# Altium PCB LTO 16S BMS.PcbDoc
Units mm, origin at the board's own origin, x right, y up, seen from the top; angles counter-clockwise.
Board outline 100 x 110 mm, 4 copper layers (L1 - Primary, L2 - GND, L3 - GND, L4 - Secondary), stack 1.685 mm thick; 56 components, 170 nets, 215 pads, 77 vias.
Unrouted connection lines stored in the file: 9.
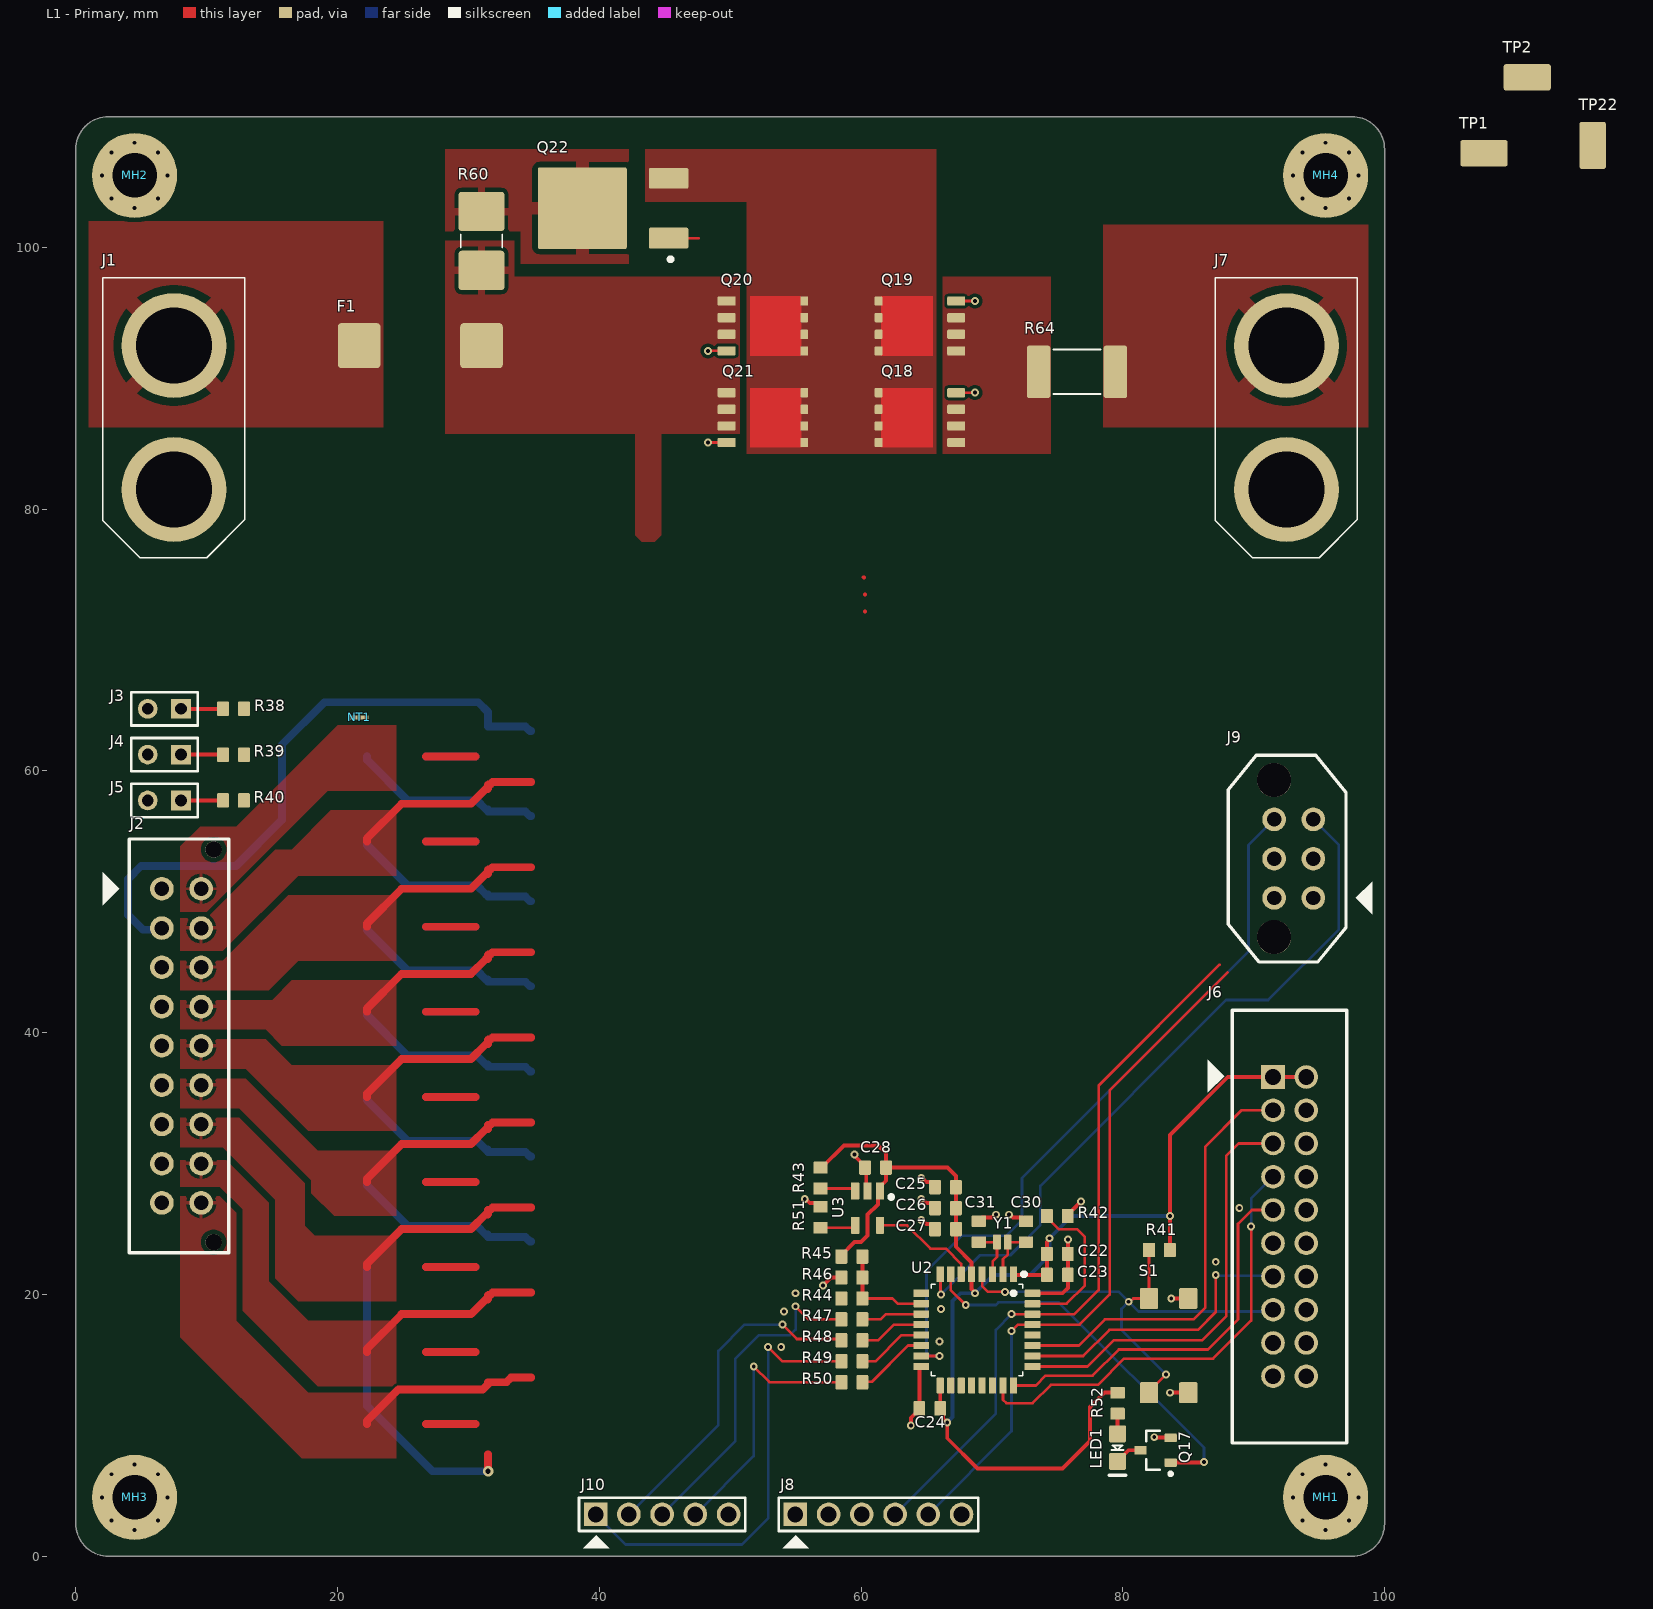
[diagram p0: L1 - Primary view]
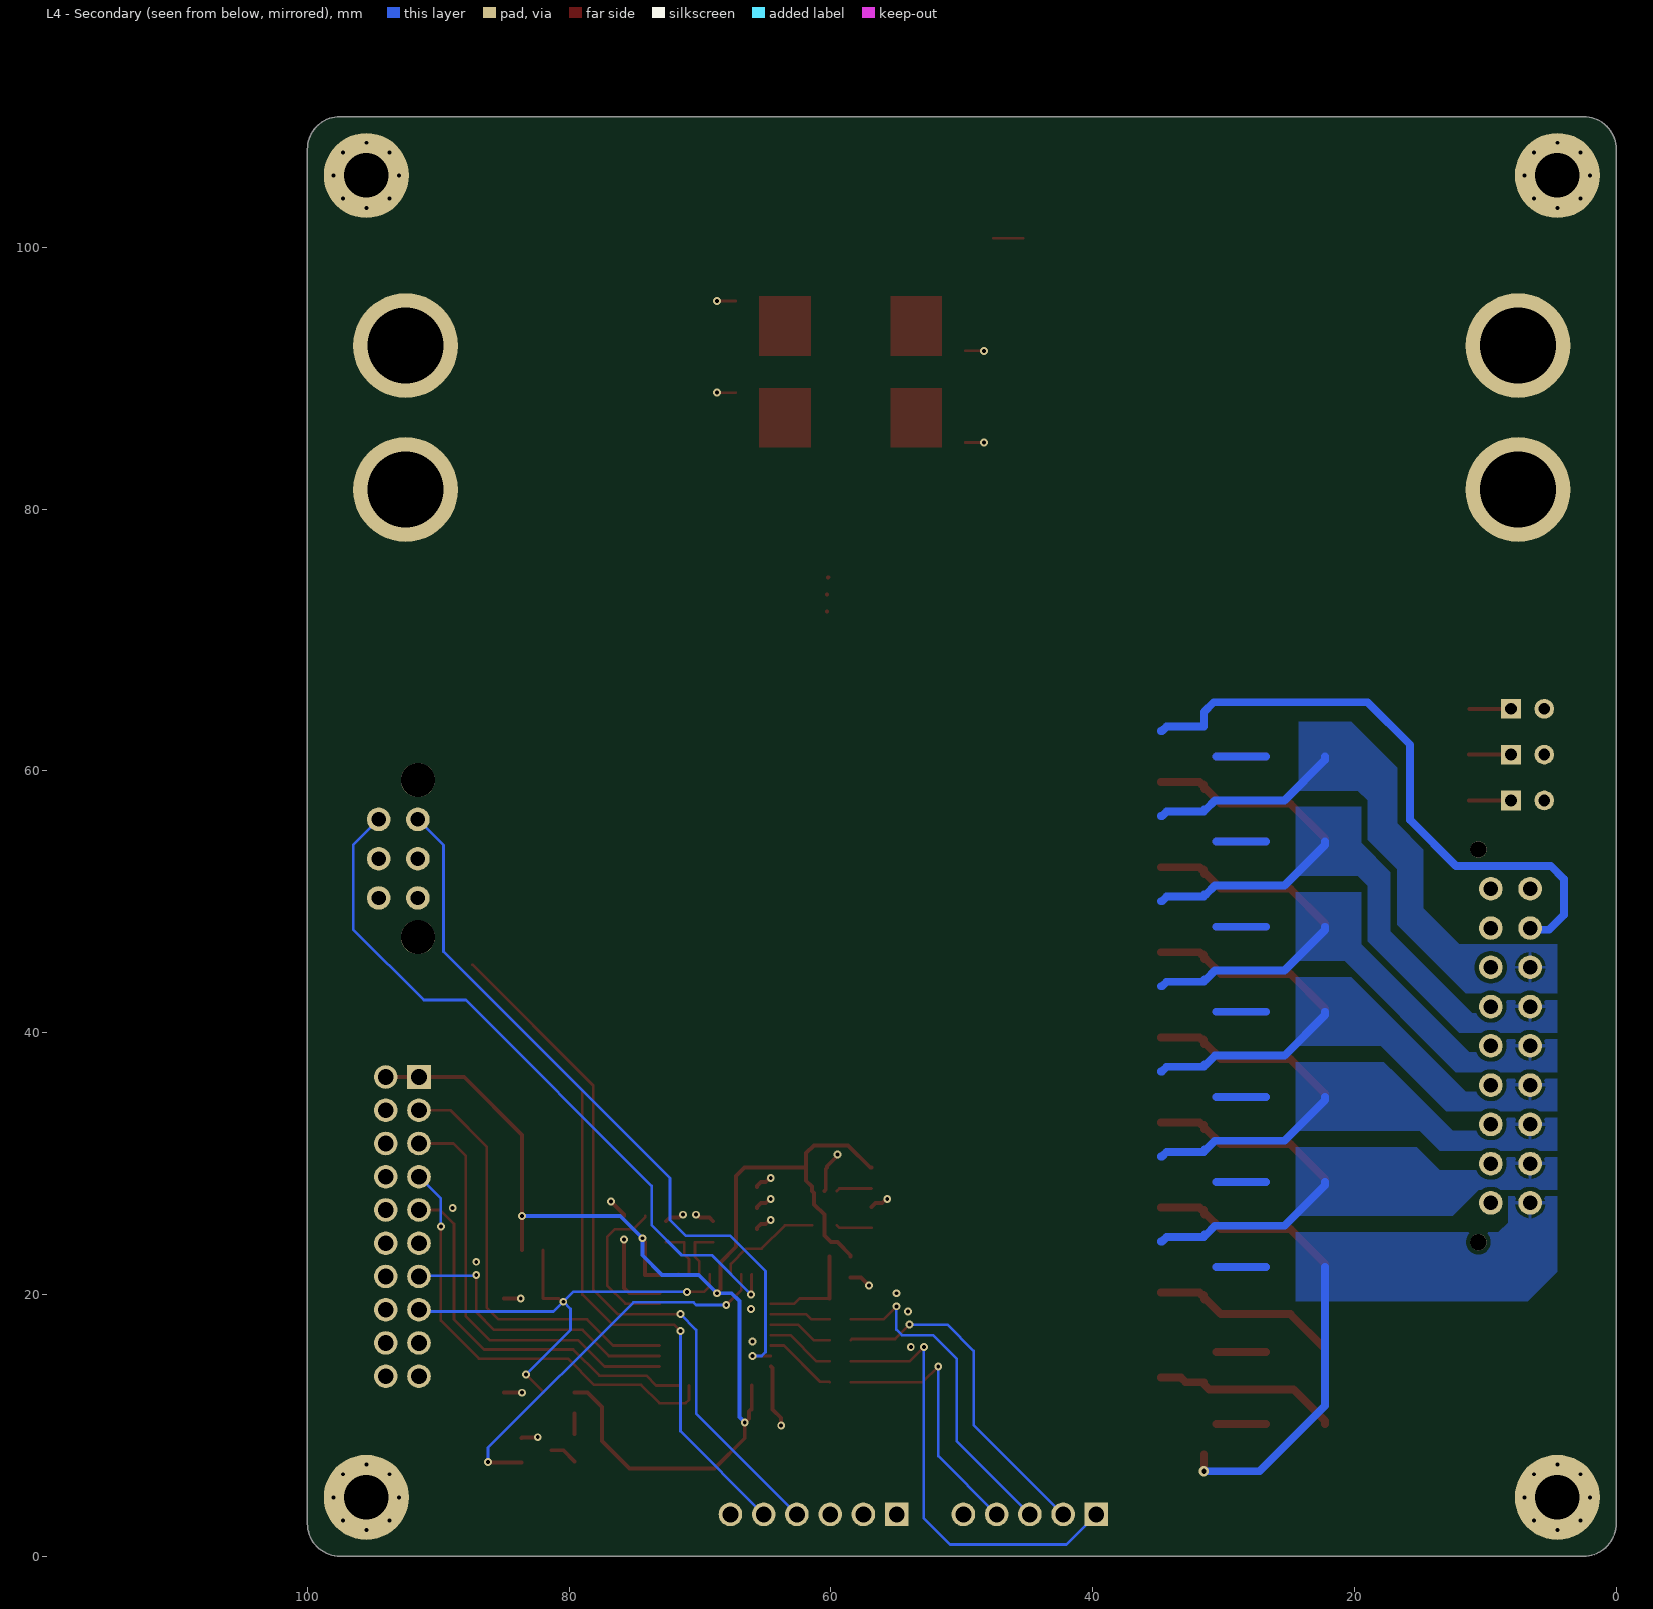
[diagram p1: L4 - Secondary view, seen from below]
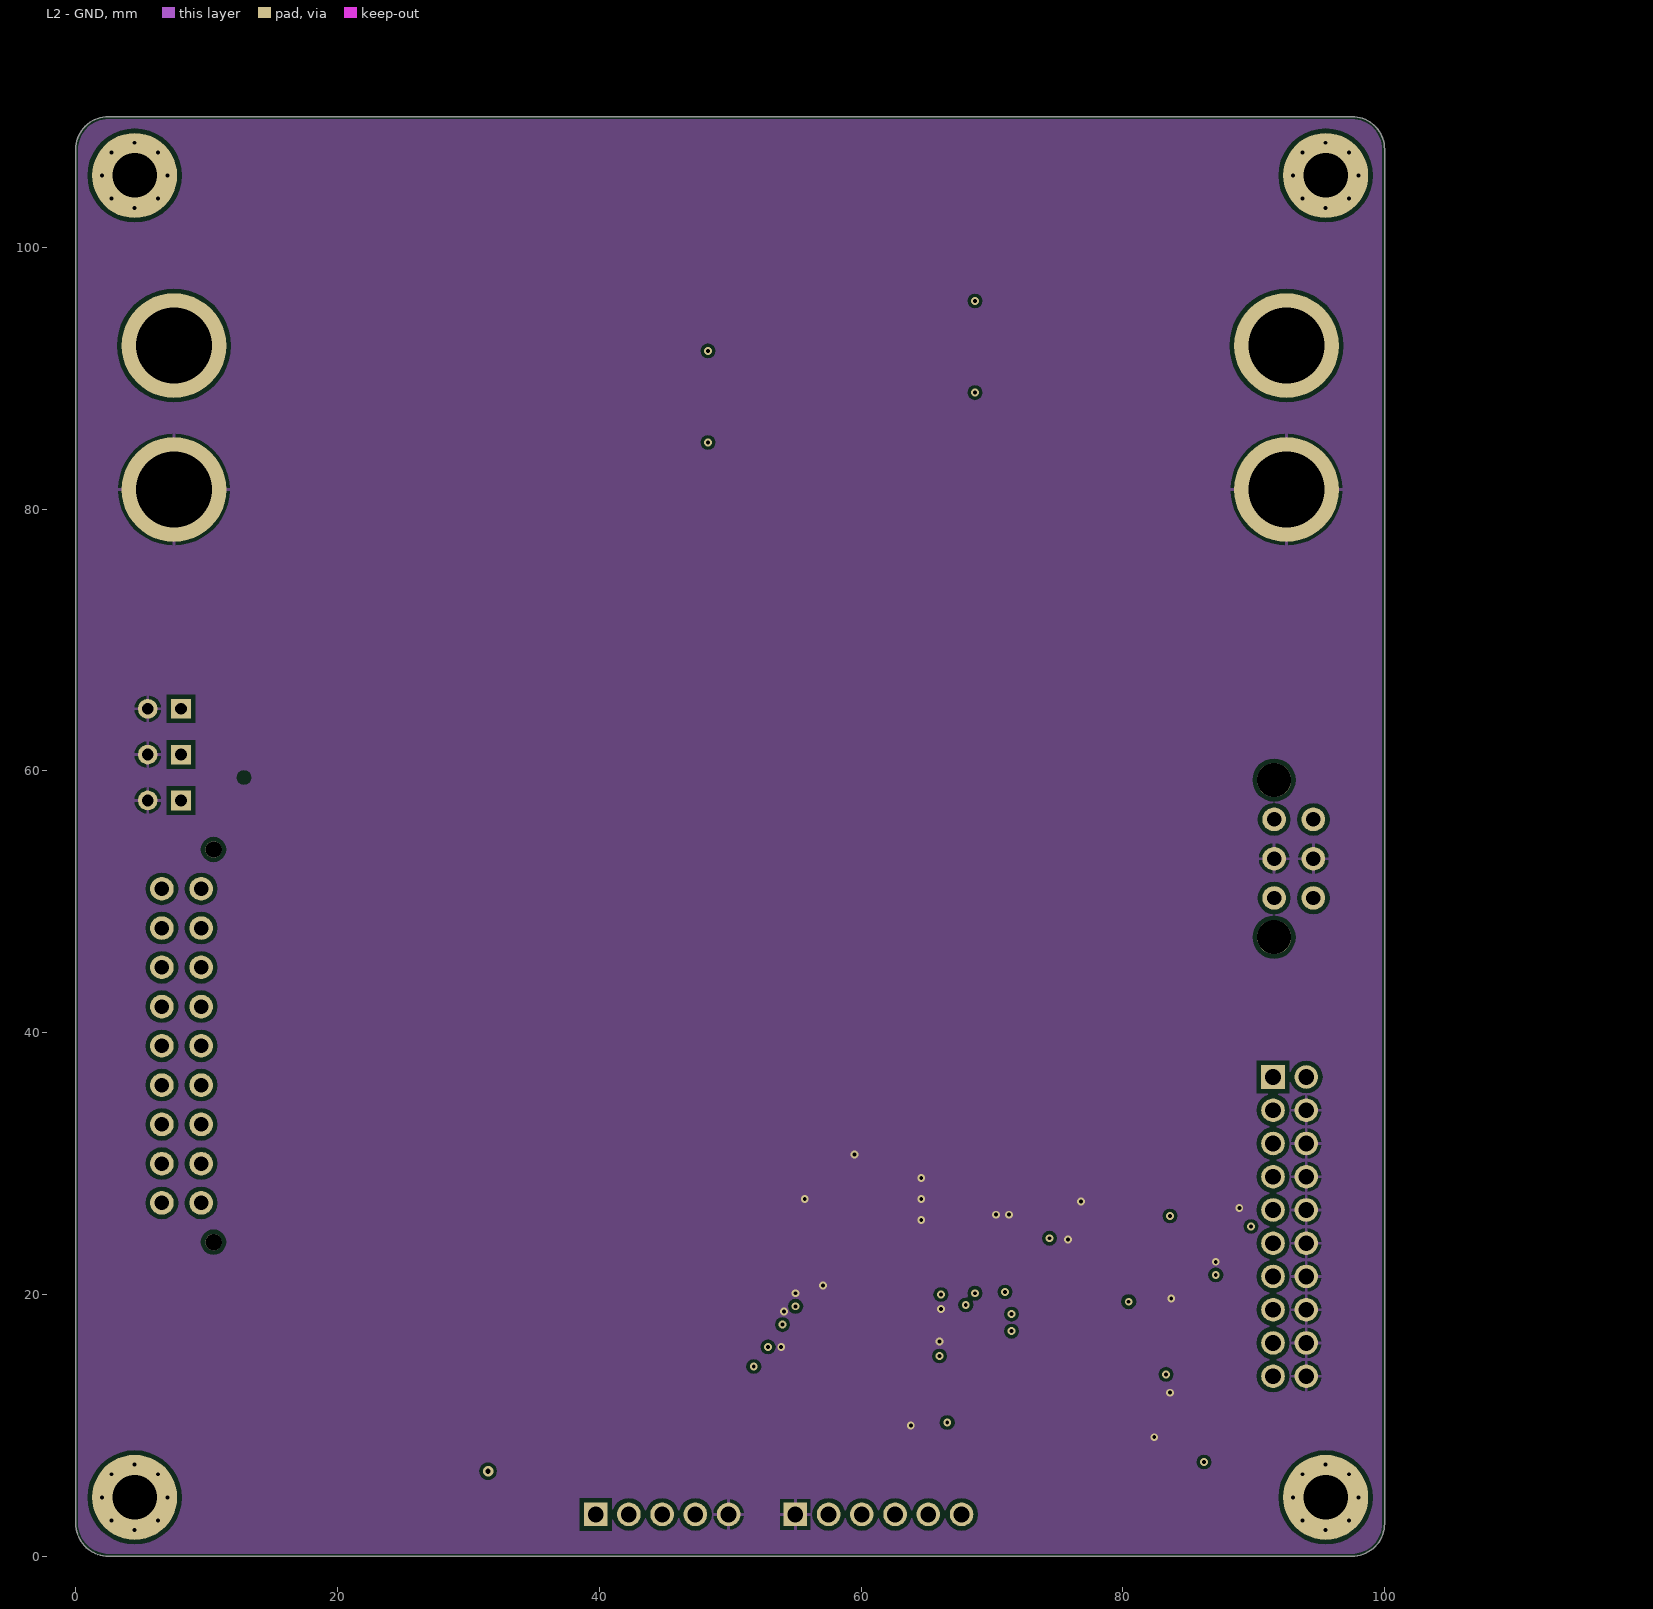
[diagram p2: L2 - GND]
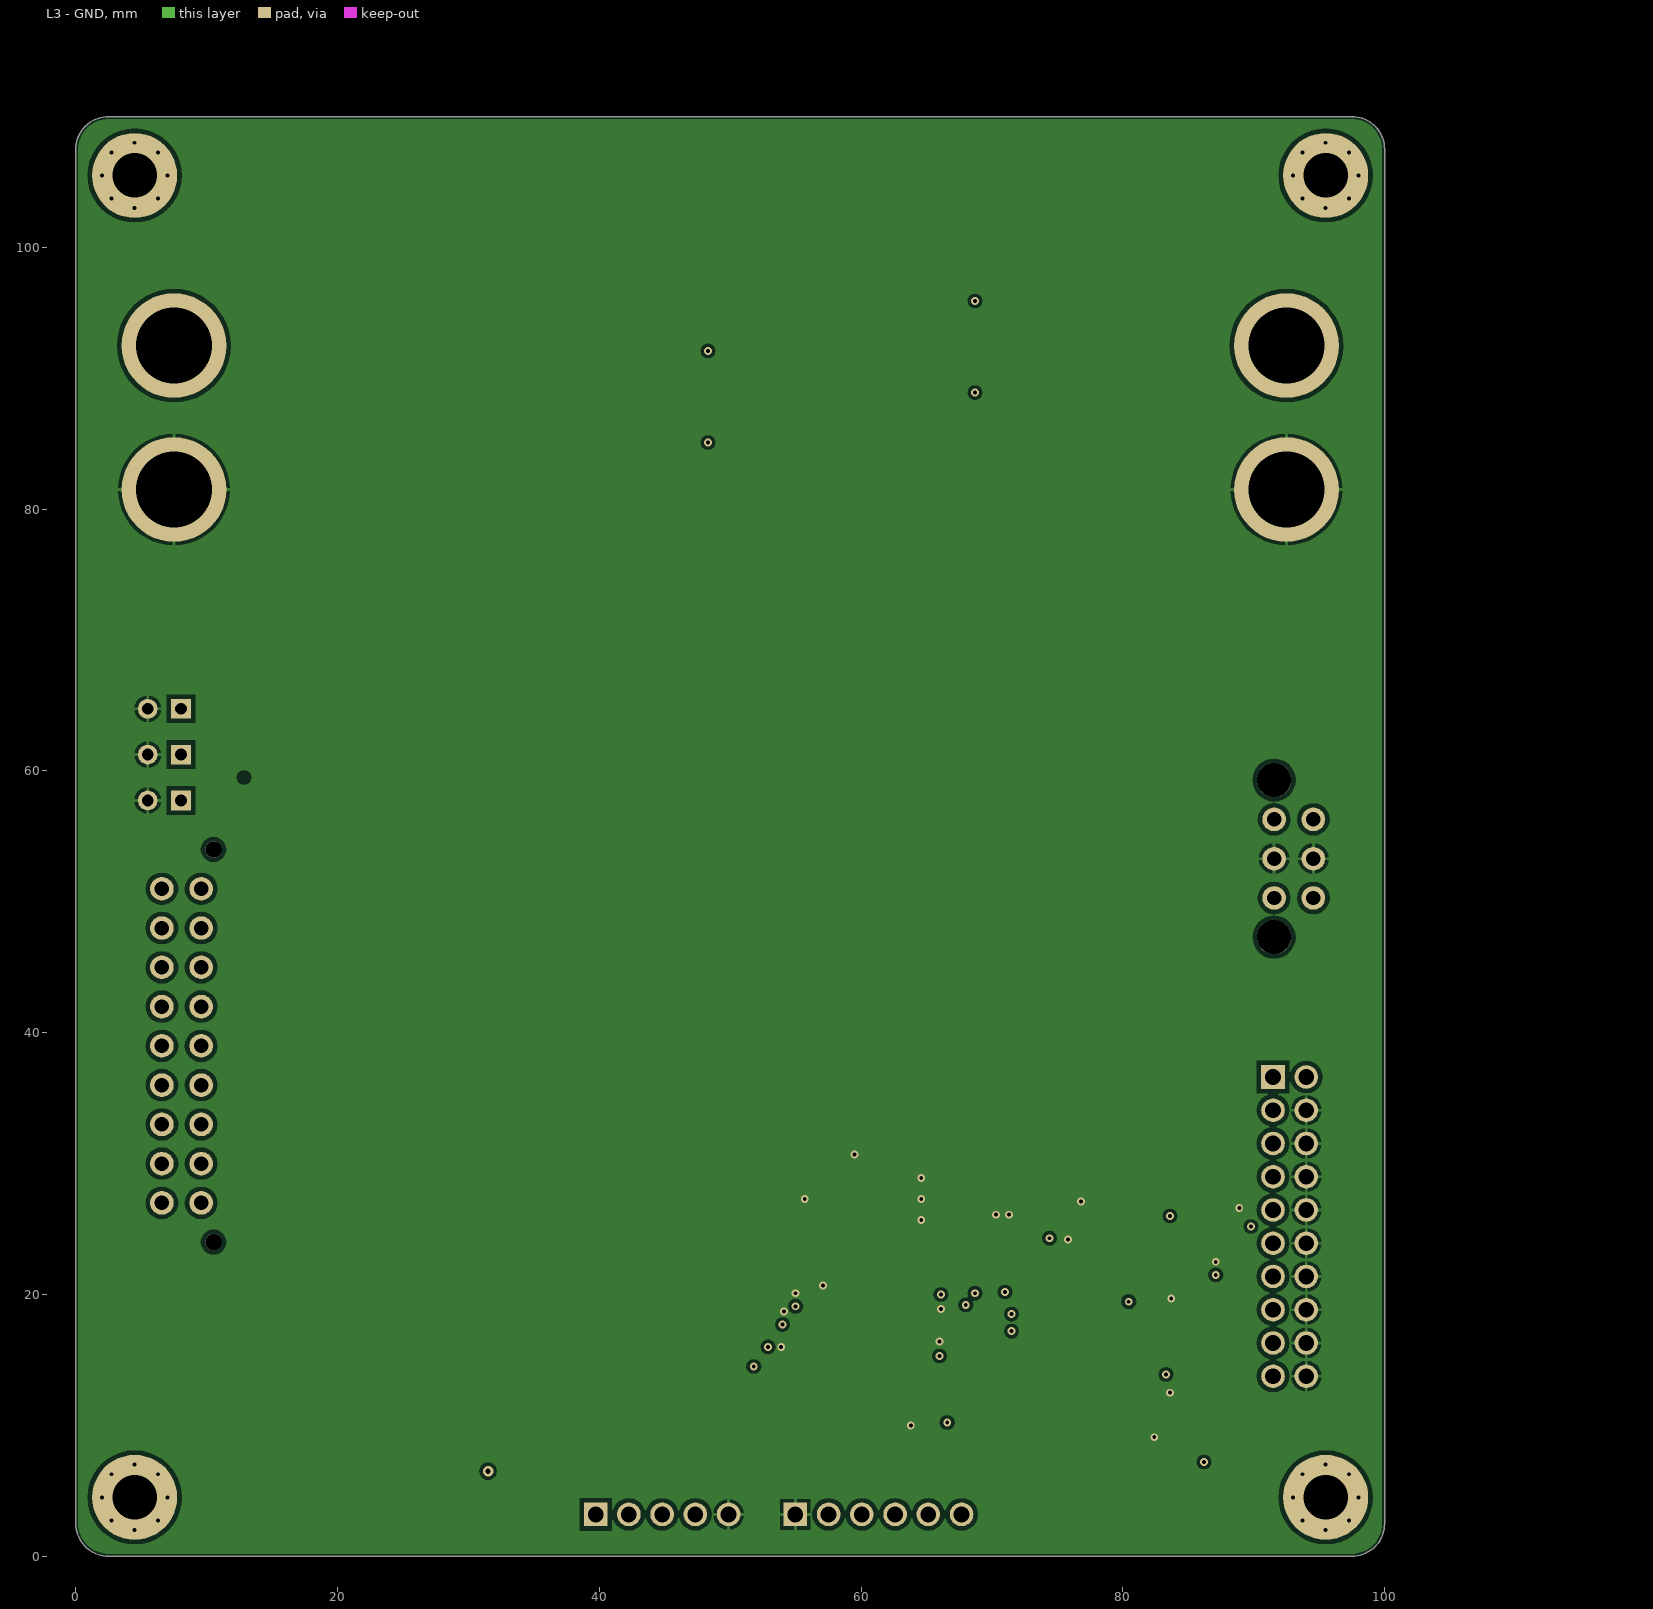
[diagram p3: L3 - GND]
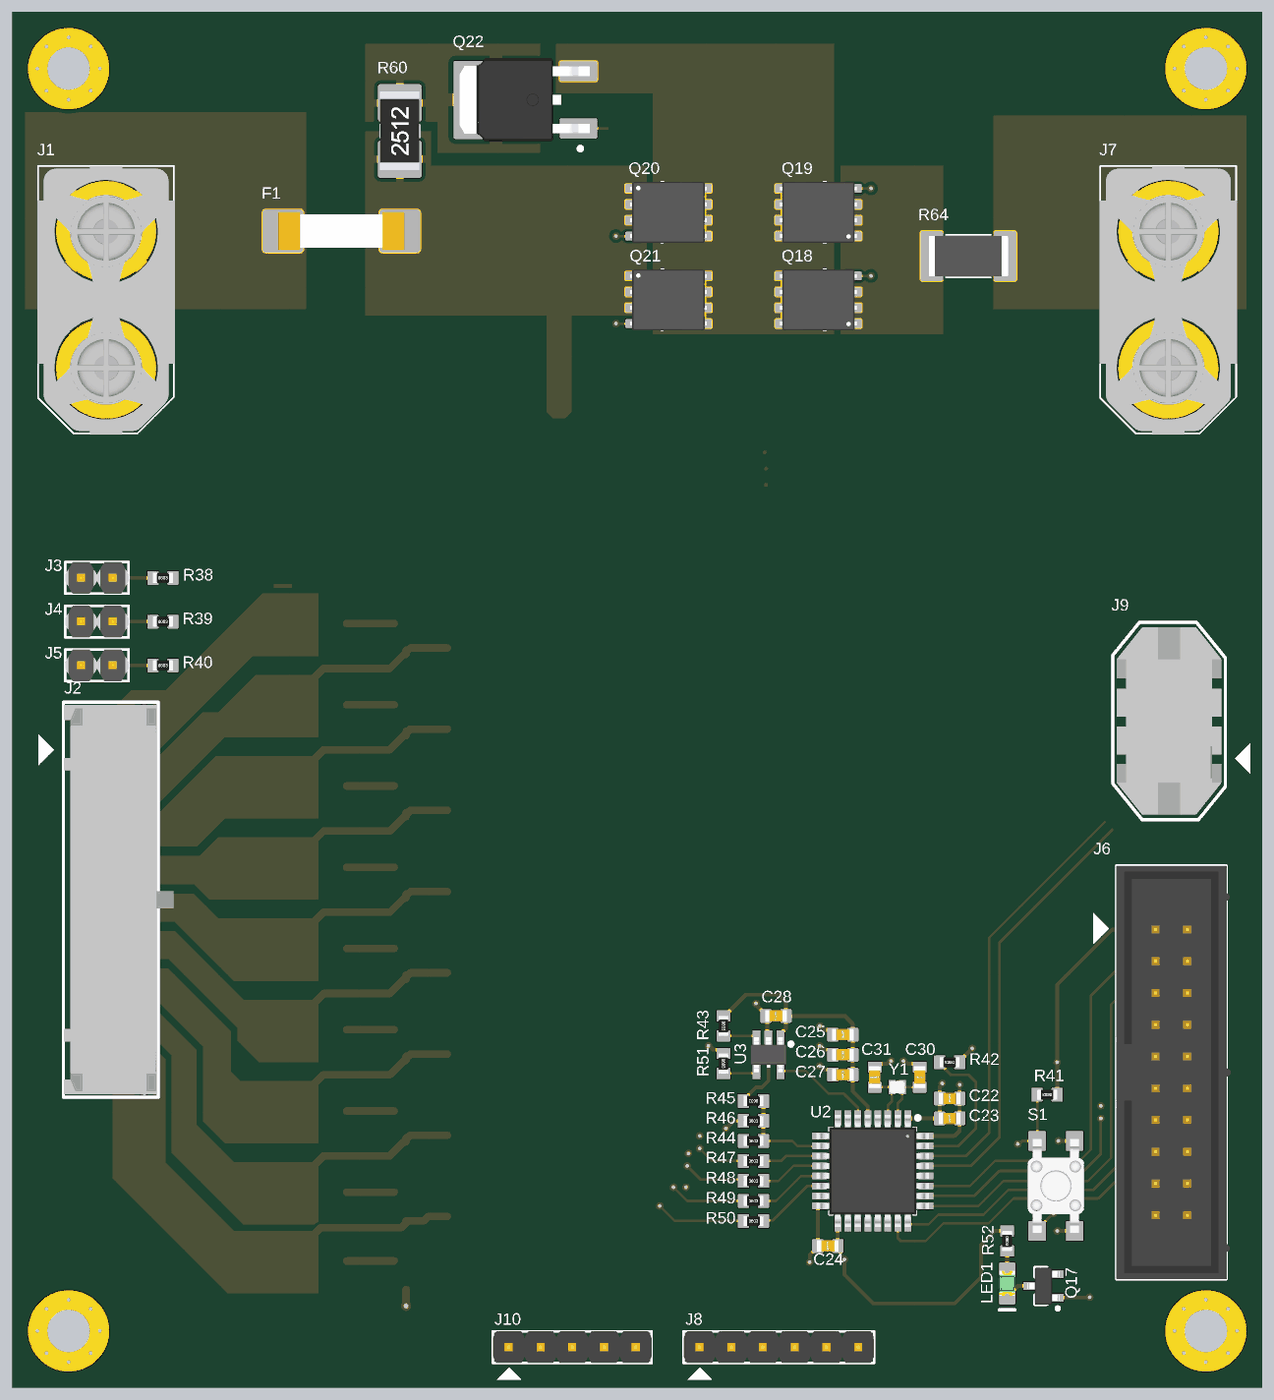
[diagram p4: 3D render of the assembled board from above, using the file's embedded part models]

## Layer stack, top to bottom
Top Solder: solder mask 0.0127, Solder Resist, Dk 3.8
L1 - Primary: signal copper 0.075
Dielectric 1: prepreg 0.2, 7628, Dk 4.6
L2 - GND: signal copper 0.035
Core: core 1.065, FR-4, Dk 4.5
L3 - GND: signal copper 0.035
Dielectric 2: prepreg 0.2, 7628, Dk 4.6
L4 - Secondary: signal copper 0.075
Bottom Solder: solder mask 0.0127, Solder Resist, Dk 3.8

## Board outline
0,2.5 0,107.5 cw(c2.5,107.5) 2.5,110 97.5,110 cw(c97.5,107.5) 100,107.5 100,2.5 cw(c97.5,2.5) 97.5,0 2.5,0 cw(c2.5,2.5)

## Design rules (kind name [scope] priority, off if disabled: settings)
BoardOutlineClearance [All] p1: gap=0.2 ignorepadtopadclearanceinfootprint=FALSE
Clearance ClearanceNetTie [HasFootprint('NET_TIE') vs HasFootprint('NET_TIE')] p1: gap=0 ignorepadtopadclearanceinfootprint=FALSE
Clearance ClearanceMidLayer1 [OnLayer('L2 - GND') Or IsVia Or IsThruPin vs OnLayer('L2 - GND')] p2: gap=0.2 ignorepadtopadclearanceinfootprint=FALSE except(0.25: SMDPad-Hole THPad-Hole Via-Hole Fill-Hole Poly-Hole Region-Hole Text-Hole; 0.254: Arc-Via Arc-Hole Track-Via Track-Hole THPad-Via Via-Via Via-Fill Via-Poly Via-Region Fill-Fill Fill-Poly Fill-Region Poly-Poly Poly-Region Region-Region; 0.33: Arc-THPad Track-THPad THPad-Fill THPad-Poly THPad-Region; 0.5: SMDPad-THPad THPad-THPad)
Clearance ClearanceMidLayer2 [OnLayer('L3 - GND') Or IsVia Or IsThruPin vs OnLayer('L3 - GND')] p3: gap=0.2 ignorepadtopadclearanceinfootprint=FALSE except(0.25: SMDPad-Hole THPad-Hole Via-Hole Fill-Hole Poly-Hole Region-Hole Text-Hole; 0.254: Arc-Via Arc-Hole Track-Via Track-Hole THPad-Via Via-Via Via-Fill Via-Poly Via-Region Fill-Fill Fill-Poly Fill-Region Poly-Poly Poly-Region Region-Region; 0.33: Arc-THPad Track-THPad THPad-Fill THPad-Poly THPad-Region; 0.5: SMDPad-THPad THPad-THPad)
Clearance ClearanceTopLayer [OnLayer('L1 - Primary') Or IsVia Or IsThruPin vs OnLayer('L1 - Primary') Or IsVia Or IsThruPin] p4: gap=0.2 ignorepadtopadclearanceinfootprint=FALSE except(0.25: SMDPad-Hole THPad-Hole Via-Hole Fill-Hole Poly-Hole Region-Hole Text-Hole; 0.254: Arc-Via Arc-Hole Track-Via Track-Hole THPad-Via Via-Via Via-Fill Via-Poly Via-Region Fill-Fill Fill-Poly Fill-Region Poly-Poly Poly-Region Region-Region; 0.33: Arc-THPad Track-THPad THPad-Fill THPad-Poly THPad-Region; 0.5: SMDPad-THPad THPad-THPad)
Clearance ClearanceBottomLayer [OnLayer('L4 - Secondary') Or IsVia Or IsThruPin vs OnLayer('L4 - Secondary') Or IsVia Or IsThruPin] p5: gap=0.2 ignorepadtopadclearanceinfootprint=FALSE except(0.25: SMDPad-Hole THPad-Hole Via-Hole Fill-Hole Poly-Hole Region-Hole Text-Hole; 0.254: Arc-Via Arc-Hole Track-Via Track-Hole THPad-Via Via-Via Via-Fill Via-Poly Via-Region Fill-Fill Fill-Poly Fill-Region Poly-Poly Poly-Region Region-Region; 0.33: Arc-THPad Track-THPad THPad-Fill THPad-Poly THPad-Region; 0.5: SMDPad-THPad THPad-THPad)
ComponentClearance [All] p1: gap=0.102 collisioncheckmode=3 verticalgap=0.102 showdistances=TRUE
DiffPairsRouting [All] p1: maxlimit=0.203 minlimit=0.102 mostfreqgap=0.203 toplayer_mingap=0.203 toplayer_minwidth=0.203 toplayer_maxwidth=1816.048 toplayer_prefwidth=0.203 midlayer1_maxgap=0.102 midlayer1_prefgap=0.102 midlayer1_minwidth=0.102 midlayer1_maxwidth=1816.048 midlayer1_prefwidth=0.102 midlayer2_maxgap=0.102 midlayer2_prefgap=0.102 midlayer2_minwidth=0.102 midlayer2_maxwidth=1816.048 midlayer2_prefwidth=0.102 bottomlayer_mingap=0.203 bottomlayer_minwidth=0.203 bottomlayer_maxwidth=1816.048 bottomlayer_prefwidth=0.203 maxuncoupledlength=12.7
Height [All] p1: minheight=0 maxheight=1816.048 prefheight=12.7
HoleSize [All] p1: absolutevalues=TRUE maxlimit=6.3 minlimit=0.2 maxpercent=80.000 minpercent=20.000
HoleToHoleClearance [All] p1: gap=0.25 allowstackedmicrovias=FALSE
MinimumAnnularRing [All] p1: minimumring=0.076
MinimumSolderMaskSliver [All] p1: minsoldermaskwidth=0.1
PolygonConnect [All] p1: thpad.connectstyle=Relief thpad.reliefconductorwidth=0.254 thpad.reliefentries=4 thpad.polygonreliefangle="90 Angle" thpad.airgapwidth=0.254 smdpad.connectstyle=Relief smdpad.reliefconductorwidth=0.254 smdpad.reliefentries=4 smdpad.polygonreliefangle="90 Angle" smdpad.airgapwidth=0.254 via.connectstyle=Direct via.reliefconductorwidth=0.254 via.reliefentries=4 via.polygonreliefangle="90 Angle" via.airgapwidth=0.254
RoutingVias [All] p1: holewidth=0.2 width=0.45 viastyle="Through Hole" minholewidth=0.2 minwidth=0.45 maxholewidth=6.3 maxwidth=6.55
ShortCircuit ShortCircuitNetTie [InNet('CELL_V0') vs InNet('VBAT-')] p1: allowed=TRUE
ShortCircuit [All] p2: allowed=FALSE
SilkToSilkClearance [All] p1: silktosilkclearance=0
SilkToSolderMaskClearance [IsPad] p1: minsilkscreentomaskgap=0.102 clearancetoexposedcopper=TRUE
SolderMaskExpansion [All] p1: expansion=0.075 istentingtop=FALSE
Width [All] p1: maxlimit=1816.048 minlimit=0.102 preferedwidth=0.203 toplayer_minwidth=0.203 midlayer1_prefwidth=0.102 midlayer2_prefwidth=0.102 bottomlayer_minwidth=0.203 minimp=50.000000 maximp=50.000000 favimp=50.000000
21 further rules are at their usual default settings.

## Classes and differential pairs
component class AFE: D17 D18
net class CELL_V[0..16]: CELL_V0 CELL_V1 CELL_V2 CELL_V3 CELL_V4 CELL_V5 CELL_V6 CELL_V7 CELL_V8 CELL_V9 CELL_V10 CELL_V11 CELL_V12 CELL_V13 CELL_V14 CELL_V15 CELL_V16
component class Top: MH1 MH2 MH3 MH4
component class "Temperature Sense": J3 J4 J5 J11
component class "STM32 MCU": C22 C23 C24 C25 C26 C27 C28 C30 C31 J11 LED1 Q17 R50 R51 R52 R65 R66 R77 R78 S1 U2 U3 Y1
component class "Pack Interface": J7 J8 J9 J10
component class "High Side FETs": Q18 Q19 Q20 Q21 Q22 R60
component class "Battery Interface": J1 J2 TP1 TP2
component class "Balancing FETs": R38 R39 R40 R44 R45 R46 R48 R65 R66 R77 R78

## Components (designator, comment, footprint, x,y, rotation, side; value= is the part's Value field where it differs from the comment)
C22 "CAP_4.7uF_16V_0603" CAP0603 75,23.1 r180 top value=4.7μF
C23 "CAP_0.1uF_16V_0603" CAP0603 75,21.5 r180 top value=0.1μF
C24 "CAP_0.1uF_16V_0603" CAP0603 65.25,11.3 r0 top value=0.1μF
C25 "CAP_1uF_16V_0603" CAP0603 66.45,28.2 r0 top value=1μF
C26 "CAP_0.1uF_16V_0603" CAP0603 66.45,26.6 r0 top value=0.1μF
C27 "CAP_0.01uF_100V_0603" CAP0603 66.45,25 r0 top value=0.01μF
C28 "CAP_0.1uF_16V_0603" CAP0603 61.1,29.7 r0 top value=0.1μF
C30 "CAP_10pF_50V_0603" CAP0603 72.6,24.8 r270 top value=10pF
C31 "CAP_10pF_50V_0603" CAP0603 69,24.8 r270 top value=10pF
F1 "FUSE_60A_3812" FUSE_3812_BOURNS 26.325,92.5 r0 top
J1 "CON_2POS_XT90" XT90 7.5,87 r270 top
J2 "0430451827" MOLEX-0430451827 8.08,39 r270 top
J3 "HEADER 2x1" HDR1X2 8.04,64.75 r180 top
J4 "HEADER 2x1" HDR1X2 8.04,61.25 r180 top
J5 "HEADER 2x1" HDR1X2 8.04,57.75 r180 top
J6 "3020-20-0100-00" CNC_3020-20-0100-00 92.746,25.19 r90 top (schematic designator J11)
J7 "CON_2POS_XT90" XT90 92.5,87 r270 top
J8 "HEADER 6x1" HDR1X6 61.33,3.2 r0 top
J9 "0447690601" MOLEX-0447690601 93.058,53.3 r90 top
J10 "HEADER 5x1" HDR1X5 44.8,3.2 r0 top
LED1 "LED_GREEN" LED_0805_GREEN 79.6,8.3 r270 top
MH1 "MOUNTING_HOLE_M3" MOUNTING_HOLE_3mm 95.5,4.5 r0 top
MH2 "MOUNTING_HOLE_M3" MOUNTING_HOLE_3mm 4.5,105.5 r0 top
MH3 "MOUNTING_HOLE_M3" MOUNTING_HOLE_3mm 4.5,4.5 r0 top
MH4 "MOUNTING_HOLE_M3" MOUNTING_HOLE_3mm 95.5,105.5 r0 top
NT1 "NetTie" NET_TIE 21.65,64.1 r180 top
Q17 "NMOS_20V_6A" SOT23-3 82.5,8.1 r180 top
Q18 "CSD19502Q5B" DFN5060 64.5,87 r90 top
Q19 "CSD19502Q5B" DFN5060 64.5,94 r90 top
Q20 "CSD19502Q5B" DFN5060 52.5,94 r270 top
Q21 "CSD19502Q5B" DFN5060 52.5,87 r270 top
Q22 "PMOS_60V_26A" "TO-252 AOSMD" 42,103 r90 top
R38 "RES_10kΩ_0603_1%" RES0603 12.05,64.75 r0 top value=4.99Ω
R39 "RES_10kΩ_0603_1%" RES0603 12.05,61.25 r0 top value=4.99Ω
R40 "RES_10kΩ_0603_1%" RES0603 12.05,57.75 r0 top value=4.99Ω
R41 "RES_10kΩ_0603_1%" RES0603 82.8,23.4 r180 top value=10kΩ (schematic designator R77)
R42 "RES_10kΩ_0603_1%" RES0603 75,26 r180 top value=10kΩ (schematic designator R78)
R43 "RES_17.8kΩ_0603_1%" RES0603 56.9,28.9 r270 top value=17.8kΩ (schematic designator R66)
R44 "RES_5.1kΩ_0603_1%" RES0603 59.3,19.7 r0 top value=4.99Ω
R45 "RES_220kΩ_0603_1%" RES0603 59.3,22.9 r180 top value=4.99Ω
R46 "RES_10kΩ_0603_1%" RES0603 59.3,21.3 r0 top value=4.99Ω
R47 "RES_33Ω_0603_1%" RES0603 59.3,18.1 r0 top value=33Ω (schematic designator R64)
R48 "RES_33Ω_0603_1%" RES0603 59.3,16.5 r0 top value=4.99Ω
R49 "RES_33Ω_0603_1%" RES0603 59.3,14.9 r0 top value=33Ω (schematic designator R65)
R50 "RES_33Ω_0603_1%" RES0603 59.3,13.3 r0 top value=10kΩ
R51 "RES_0Ω_0603" RES0603 56.9,25.9 r270 top value=0Ω
R52 "RES_604Ω_0603_1%" RES0603 79.6,11.7 r270 top value=604Ω
R60 "RES_1kΩ_2512_1%" RES2512 31,100.5 r90 top value=1kΩ
R64 "RES_1mΩ_2512_1%" RESC6532X75N 76.5,90.5 r0 top value=1mΩ
S1 "SW_SPST_NO_4.5x4.5" SPST_PUSHBUTTON_TL3305AF260QG 83.5,16.1 r270 top
TP1 "TESTPOINT_SMD_LOOP" S1751-46R 107.6,107.2 r0 top
TP2 "TESTPOINT_SMD_LOOP" S1751-46R 110.9,113 r0 top
TP22 "TESTPOINT_SMD_LOOP" S1751-46R 115.9,107.8 r90 top
U2 "STM32L412K8T6" STM-LQFP32 68.85,17.3 r270 top
U3 "LTC6905CS5#TRMPBF" SOT23-5 60.5,26.6 r270 top
Y1 "CRYSTAL_32.768KHZ" OSC_ECS-327TR-2 70.8,24 r180 top

## Footprints (in the part's own frame and the unit in brackets; to place one, negate y for a bottom-side part, rotate by r counter-clockwise, add the part's x,y. Pads: shape width x height; smd on the part's side, far side on the other; paste and mask are expansions set on the pad)
CAP0603 [mm]
  rrect20% 0.9x1.1 smd: 1(-0.8,0) 2(0.8,0)
  body extent -0.88,-0.48 0.87,0.47, height 0.87
CNC_3020-20-0100-00 [mm]
  rect 1.8x1.8 hole 1.2: 1(11.43,1.27)
  round 1.8 hole 1.2: 2(11.43,-1.27) 3(8.89,1.27) 4(8.89,-1.27) 5(6.35,1.27) 6(6.35,-1.27) 7(3.81,1.27) 8(3.81,-1.27) 9(1.27,1.27) 10(1.27,-1.27) 11(-1.27,1.27) 12(-1.27,-1.27) 13(-3.81,1.27) 14(-3.81,-1.27) 15(-6.35,1.27) 16(-6.35,-1.27) 17(-8.89,1.27) 18(-8.89,-1.27) 19(-11.43,1.27) 20(-11.43,-1.27)
  silkscreen extent -16.53,-4.38 16.53,6.25, body extent -16.53,-4.75 16.53,4.43, height 8.82
DFN5060 [mm]
  rrect25% 0.71x1.372 smd: 1(-1.905,-2.77) 2(-0.635,-2.77) 3(0.635,-2.77) 4(1.905,-2.77)
  rrect25% 0.71x0.59 smd: 5(1.905,3.161) 6(0.635,3.161) 7(-0.635,3.161) 8(-1.905,3.161)
  L1 - Primary region: -2.26,-0.984 -2.26,2.95 2.26,2.95 2.26,-0.984
  body extent -2.5,-3.08 2.5,3.08, height 1.1
FUSE_3812_BOURNS [mm] "Chip Fuse, Body 10.1mm x 3.1mm x 3.3mm"
  rrect15% 3.25x3.43 smd: 1(-4.675,0) 2(4.675,0)
  body extent -5.05,-1.55 5.05,1.55, height 3.1
HDR1X2 [mm] "Connector; Header; 2 Position"
  rect 1.5x1.5 hole 0.9: 1(0,0)
  round 1.5 hole 0.9: 2(2.54,0)
  silkscreen extent -1.27,-1.27 3.81,1.27, body extent -1.27,-1.27 3.81,1.27, height 6.35
HDR1X5 [mm] "Connector; Header; 5 Position"
  rect 1.8x1.8 hole 1.2: 1(-5.08,0)
  round 1.8 hole 1.2: 2(-2.54,0) 3(0,0) 4(2.54,0) 5(5.08,0)
  silkscreen extent -6.35,-2.6 6.35,1.27, body extent -6.35,-1.27 6.35,1.27, height 8.57
HDR1X6 [mm] "Connector; Header; 6 Position"
  rect 1.8x1.8 hole 1.2: 1(-6.35,0)
  round 1.8 hole 1.2: 2(-3.81,0) 3(-1.27,0) 4(1.27,0) 5(3.81,0) 6(6.35,0)
  silkscreen extent -7.62,-2.6 7.62,1.27, body extent -7.62,-1.27 7.62,1.27, height 8.57
LED_0805_GREEN [mm] "SMD, 2-Leads, Body 2x1.25mm"
  rrect20% 1.3x1.3 smd: 1(-1.05,0) 2(1.05,0)
  silkscreen extent -0.18,-0.63 2.11,0.64, body extent -1,-0.62 1,0.63, height 1.12
MOLEX-0430451827 [mm]
  round 1.8 hole 1.1: 1(-12,-1.5) 2(-9,-1.5) 3(-6,-1.5) 4(-3,-1.5) 5(0,-1.5) 6(3,-1.5) 7(6,-1.5) 8(9,-1.5) 9(12,-1.5) 10(-12,1.5) 11(-9,1.5) 12(-6,1.5) 13(-3,1.5) 14(0,1.5) 15(3,1.5) 16(6,1.5) 17(9,1.5) 18(12,1.5)
  round 1.25 hole 1.25 unplated mask+0.05: MH1(-15,2.45) MH2(15,2.45)
  silkscreen extent -15.8,-6 15.8,3.6, body extent -15.58,-3.94 15.58,4.83, height 9.9
MOLEX-0447690601 [mm]
  round 1.8 hole 1.1: 1(-3,-1.5) 2(0,-1.5) 3(3,-1.5) 4(-3,1.5) 5(0,1.5) 6(3,1.5)
  round 2.6 hole 2.6 unplated mask+0.05: MH1(-6,1.5) MH2(6,1.5)
  silkscreen extent -7.9,-6 7.9,5, body extent -7.5,-3.7 7.5,4.7, height 13.6
MOUNTING_HOLE_3mm [mm] "3mm Hole"
  round 6.5 hole 3.4: 0(0,0)
NET_TIE [mm]
  rect 0.75x0.3 smd paste-0.15 mask-2.5: 1(-0.35,0) 2(0.35,0)
OSC_ECS-327TR-2 [mm]
  rrect15% 0.575x1.14 smd mask+0.05: 1(-0.413,0) 2(0.413,0)
  body extent -0.6,-0.5 0.6,0.5, height 0.35
RES0603 [mm] "Chip Resistor, Body 1.6x0.8mm, IPC Medium Density"
  rrect15% 0.9x1.1 smd: 1(-0.8,0) 2(0.8,0)
  body extent -0.8,-0.4 0.8,0.4, height 0.46
RES2512 [mm]
  rrect15% 3x3.5 smd: 1(-2.25,0) 2(2.25,0)
  silkscreen extent -0.5,-1.58 0.5,1.58, body extent -3.13,-1.58 3.17,1.58, height 0.82
RESC6532X75N [mm]
  rrect20% 1.8x4 smd: 1(-2.935,0) 2(2.935,0)
  silkscreen extent -1.79,-1.7 1.79,1.7, body extent -3.17,-1.6 3.18,1.6, height 0.65
S1751-46R [mm] "SMD LOOP TESTPOINT"
  rrect15% 3.6x2 smd: 1(0,0)
  body extent -1.62,-0.85 1.63,0.8, height 2.01
SOT23-3 [mm] "SOT23, 3-Leads, Body 2.90x2.30mm, Pitch 0.95mm, IPC Medium Density"
  rrect25% 0.95x0.65 smd: 1(-1.15,0.95) 2(-1.15,-0.95) 3(1.15,0)
  silkscreen extent -1.28,-1.5 0.7,1.92, body extent -1.3,-1.5 1.3,1.5, height 1.1
SOT23-5 [mm]
  rrect15% 1.3x0.63 smd: 1(-1.31,0.95) 2(-1.31,0) 3(-1.31,-0.95) 4(1.31,-0.95) 5(1.31,0.95)
  silkscreen extent -0.99,1.66 -0.71,1.94, body extent -1.4,-1.45 1.4,1.45, height 1.2
SPST_PUSHBUTTON_TL3305AF260QG [mm]
  rrect15% 1.6x1.4 smd: 1(-3.6,-1.5) 2(3.6,-1.5) 3(-3.6,1.5) 4(3.6,1.5)
  body extent -3.75,-2.25 3.75,2.25, height 3.7
STM-LQFP32 [mm]
  rrect15% 1.2x0.55 smd mask+0.05: 1(-4.25,2.8) 2(-4.25,2) 3(-4.25,1.2) 4(-4.25,0.4) 5(-4.25,-0.4) 6(-4.25,-1.2) 7(-4.25,-2) 8(-4.25,-2.8) 17(4.25,-2.8) 18(4.25,-2) 19(4.25,-1.2) 20(4.25,-0.4) 21(4.25,0.4) 22(4.25,1.2) 23(4.25,2) 24(4.25,2.8)
  rrect15% 0.55x1.2 smd mask+0.05: 9(-2.8,-4.25) 10(-2,-4.25) 11(-1.2,-4.25) 12(-0.4,-4.25) 13(0.4,-4.25) 14(1.2,-4.25) 15(2,-4.25) 16(2.8,-4.25) 25(2.8,4.25) 26(2,4.25) 27(1.2,4.25) 28(0.4,4.25) 29(-0.4,4.25) 30(-1.2,4.25) 31(-2,4.25) 32(-2.8,4.25)
  silkscreen extent -4.4,-3.5 3.5,3.75, body extent -4.5,-4.5 4.5,4.5, height 1.6
"TO-252 AOSMD" [mm]
  rrect15% 1.6x3 smd: 1(-2.286,-3.3) 3(2.286,-3.3)
  rrect5% 6.25x6.8 smd: 2(0,3.3)
  silkscreen extent -4.05,-3.59 -3.75,-3.3, body extent -3.36,-4.21 3.36,6.21, height 2.39
XT90 [mm]
  round 8 hole 5.8: 1(-5.5,0) 2(5.5,0)
  silkscreen extent -10.7,-5.45 10.7,5.42, body extent -10.7,-5.5 10.7,5.5, height 20.7

## Part data
C22: "CAP CER 4.7UF 16V X6S 0603", Dielectric=X6S, Manufacturer 1="Murata Electronics", Manufacturer Part Number 1=GRM188C81C475KE11D, Package=0603, Supplier Part Number 1=490-13362-1-ND, Voltage Rating=16V, Mounting Type=SMD, Supplier 1=Digi-Key
C23 C24 C26 C28: "CAP CER 0.1UF 16V X7R 0603", Dielectric=X7R, Manufacturer 1=Yageo, Manufacturer Part Number 1=CC0603KRX7R7BB104, Package=0603, Supplier Part Number 1=311-1088-1-ND, Voltage Rating=16V, Supplier 1=Digi-Key
C25: "CAP CER 1UF 16V X7R 0603", Dielectric=X7R, Manufacturer 1=Yageo, Manufacturer Part Number 1=CC0603KPX7R7BB105, Package=0603, Supplier Part Number 1=13-CC0603KPX7R7BB105CT-ND, Voltage Rating=16V, Mounting Type=SMD, Supplier 1=Digi-Key
C27: "CAP CER 0.01uF 100V X7R 0603", Dielectric=X7R, Manufacturer 1="Murata Electronics", Manufacturer Part Number 1=GCM188R72A103KA37J, Supplier Part Number 1=490-8028-1-ND, Voltage Rating=100V, Supplier 1=Digi-Key
C30 C31: "CAP CER 10PF 50V X7R 0603", Manufacturer 1=KEMET, Manufacturer Part Number 1=C0603C100J5RAC7867, Package=0603, Supplier Part Number 1=399-C0603C100J5RAC7867CT-ND, Voltage Rating=50V, Supplier 1=Digi-Key
F1: "FUSE BRD 60A 250VAC 100VDC 2SMD", Current Rating=60A, Manufacturer 1="Bourns Inc.", Manufacturer Part Number 1=SF-3812F6000T-2, Package/Footprint=3812, Supplier Part Number 1=118-SF-3812F6000T-2CT-ND, Mounting Type=SMD, Supplier 1=Digi-Key, Verified=No
J1 J7: "HIGH QUALITY GOLD PLATED XT90 MA", Manufacturer 1=DFRobot, Manufacturer Part Number 1=FIT0588, Package/Footprint=XT90, Supplier Part Number 1=1738-1438-ND, Mounting Type=TH, Supplier 1=Digi-Key
J2: library part CON_MOLEX-HDR_9x2_TH, "CONN HEADER VERT 18POS 3MM", Current Rating=5A, Manufacturer 1=Molex, Supplier Part Number 1=WM10723-ND, Voltage Rating=250VAC, Family="Micro-Fit 3.0", Manufacturer Part Number 1=0430451827, Pitch=3mm, Supplier 1=Digi-Key
J3 J4 J5: "HEADER 2X1", Manufacturer 1="Harwin Inc.", Manufacturer Part Number 1=M20-9990246, Package/Footprint=TH, Supplier Part Number 1=952-2262-ND, Mounting Type=TH, Supplier 1=Digi-Key
J6: library part CON_10x2_HEADER, "CONN HEADER VERT 20POS 2.54MM", Manufacturer 1="CNC Tech", Supplier Part Number 1=1175-1612-ND, Manufacturer Part Number 1=3020-20-0100-00, Supplier 1=Digi-Key
J8: "CONN HEADER VERT 6POS 2.54MM", Manufacturer 1="Würth Elektronik", Manufacturer Part Number 1=61300611121, Supplier Part Number 1=732-5319-ND, Mounting Type=TH, Pitch=2.54mm, Supplier 1=Digi-Key
J9: library part CON_MOLEX-RCPT_2x2_TH, "CONN RCPT 4POS 0.118 TIN PCB", Current Rating=5A, Manufacturer 1=Molex, Manufacturer Part Number 1=0447690401, Supplier Part Number 1=23-0447690401-ND, Voltage Rating=250VAC, Family="Micro-Fit 3.0", Pitch=3mm, Supplier 1=Digi-Key
J10: "CONN HEADER VERT 5POS 2.54MM", Manufacturer 1="Würth Elektronik", Manufacturer Part Number 1=61300511121, Supplier Part Number 1=732-5318-ND, Mounting Type=TH, Pitch=2.54mm, Supplier 1=Digi-Key
LED1: "LED GREEN DIFFUSED 0805 SMD", Forward Voltage Drop=2.2V, Manufacturer 1=OSRAM, Manufacturer Part Number 1="LG R971-KN-1", Package/Footprint=0805, Supplier Part Number 1=475-1410-1-ND, Mounting Type=SMD, Supplier 1=Digi-Key
Q17: library part NMOS_20V_2.6A, "MOSFET N-CH 20V 2.6A SOT23-3", Manufacturer 1="Vishay Siliconix", Manufacturer Part Number 1=SI2302CDS-T1-E3, Package/Footprint=SOT-23-3, Supplier Part Number 1=SI2302CDS-T1-E3CT-ND, Supplier 1=Digi-Key
Q18 Q19 Q20: library part NMOS_CSD19502Q5B_80V_100A, "MOSFET N-CH 80V 100A 8VSON", Manufacturer 1="Texas Instruments", Package/Footprint=8-PowerTDFN, Supplier Part Number 1=296-37194-1-ND, Id=100A, Manufacturer Part Number 1=CSD19502Q5B, Supplier 1=Digi-Key, Vdss (Max)=80V, Vgs (Max)=±20V
Q21: library part PMOS_60V_26A, "MOSFET P-CH 60V 26A TO252", Manufacturer 1="Alpha & Omega Semiconductor Inc.", Manufacturer Part Number 1=AOD409, Supplier Part Number 1=785-1103-1-ND, Id=26A, Mounting Type=SMD, Supplier 1=Digi-Key, Vdss=60V, Vgs (Max)=±20V
Q22: "MOSFET P-CH 60V 26A TO252", Manufacturer 1="Alpha & Omega Semiconductor Inc.", Manufacturer Part Number 1=AOD409, Supplier Part Number 1=785-1103-1-ND, Id=26A, Mounting Type=SMD, Supplier 1=Digi-Key, Vdss=60V, Vgs (Max)=±20V
R38 R39 R40 R44 R45 R46 R48: library part RES_4.99Ω_2512_1%, "RES 4.99 OHM 1% 2W 2512", Manufacturer 1="Stackpole Electronics Inc", Manufacturer Part Number 1=RHC2512FT4R99, Supplier Part Number 1=RHC2512FT4R99CT-ND, Supplier 1=Digi-Key
R41 R42: "RES 10K OHM 1% 1/8W 0603", Manufacturer 1="Stackpole Electronics Inc", Manufacturer Part Number 1=RNCP0603FTD10K0, Package=0603, Supplier Part Number 1=RNCP0603FTD10K0CT-ND, Mounting Type=SMD, Supplier 1=Digi-Key
R43: "RES 17.8K OHM 1% 1/10W 0603", Manufacturer 1=YAGEO, Manufacturer Part Number 1=RC0603FR-0717K8L, Supplier Part Number 1=311-17.8KHRCT-ND, Supplier 1=Digi-Key
R47 R49: "RES 33 OHM 1% 1/10W 0603", Manufacturer 1=Vishay, Manufacturer Part Number 1=CRCW060333R0FKEA, Package=0603, Supplier Part Number 1=541-33.0HCT-ND, Mounting Type=SMD, Supplier 1=Digi-Key
R50: library part RES_10kΩ_0603_1%, "RES 10K OHM 1% 1/8W 0603", Manufacturer 1="Stackpole Electronics Inc", Manufacturer Part Number 1=RNCP0603FTD10K0, Package=0603, Supplier Part Number 1=RNCP0603FTD10K0CT-ND, Mounting Type=SMD, Supplier 1=Digi-Key
R51: "RES 0 OHM JUMPER 1/10W 0603", Manufacturer 1=Yageo, Manufacturer Part Number 1=RC0603JR-070RL, Package=0603, Supplier Part Number 1=311-0.0GRCT-ND, Mounting Type=SMD, Supplier 1=Digi-Key
R52: "RES 604 OHM 1% 1/10W 0603", Manufacturer 1=Yageo, Manufacturer Part Number 1=RC0603FR-07604RL, Supplier Part Number 1=311-604HRCT-ND, Supplier 1=Digi-Key
R60: "RES SMD 1K OHM 1% 3W 2512", Manufacturer 1="TE Connectivity Passive Product", Manufacturer Part Number 1=35221K0FT, Package=2512, Supplier Part Number 1=A121161CT-ND, Mounting Type=SMD, Supplier 1=Digi-Key
R64: "RES 1 mOHM 1% 3W 2512", Manufacturer 1=Riedon, Manufacturer Part Number 1=CSRL3-0R001F8, Package=2512, Supplier Part Number 1=696-1834-1-ND, Mounting Type=SMD, Supplier 1=Digi-Key
S1: "SWITCH TACTILE SPST-NO 50MA 12V", Manufacturer 1=E-Switch, Manufacturer Part Number 1=TL3305AF260QG, Supplier Part Number 1=EG5353CT-ND, Mounting Type=SMD, Supplier 1=Digi-Key
TP1 TP2 TP22: "TESTPOINT SMD LOOP", Manufacturer 1=Harwin, Manufacturer Part Number 1=S1751-46R, Package/Footprint=SMD, Supplier Part Number 1=952-1478-1-ND, Mounting Type=SMD, Supplier 1=Digi-Key
U2: "IC MCU 32BIT 64KB FLASH 32LQFP", Manufacturer 1=STMicroelectronics, Package/Footprint=32-LQFP, Supplier Part Number 1=497-STM32L412K8T6-ND, Manufacturer Part Number 1=STM32L412K8T6, Supplier 1=Digi-Key
U3: library part IC_OSC_LTC6905, "IC OSC SILICON PROG TSOT23-5", Manufacturer 1="Analog Devices Inc.", Package/Footprint=SOT-23-5, Supplier Part Number 1=505-LTC6905CS5#TRMPBFCT-ND, Manufacturer Part Number 1=LTC6905CS5#TRMPBF, Supplier 1=Digi-Key
Y1: "CRYSTAL 32.7680KHZ 9PF SMD", Frequency=32.768kHz, Manufacturer 1="ECS Inc.", Manufacturer Part Number 1=ECS-.327-9-1210-TR, Supplier Part Number 1=XC2283CT-ND, Supplier 1=Digi-Key

## Via types
v1: diameter 0.6, hole 0.3, L1 - Primary to L4 - Secondary, tented both sides, 76 vias
v2: diameter 0.8, hole 0.4, L1 - Primary to L4 - Secondary, tented both sides, 1 vias

## Nets (pads, with @x,y where several pads share a name; then routed paths per layer and width w, separated by ;. In a path a pad name is that pad's centre, name@x,y a point inside that pad or via, vN(x,y) a via of type N, cw(c..) or ccw(c..) an arc to the next point about the centre after c; other vN are vias at no path point)
3V3: C22.2 C23.2 C24.2 C25.2 C26.2 C27.2 C28.2 J6.1 J6.2 R41.1 R43.1 R45.2 R52.1 TP22.1 U2.1 U2.5 U2.17 U3.1 | length 109
  L1 - Primary w0.3: R43.1 57,29.7 58.7,31.4 61.3,31.4 61.9,30.8 C28.2 ; R45.2 58.5,23 59.5,24 60,24 60.5,24.5 60.5,26.1 61.285,26.885 61.285,27.745 U3.1 61.45,28.245 61.9,28.695 C28.2 ; C24.2@66.05,11.2 C24.2 ; U2.17 C24.2 ; v1(68.7,20.1) 68.7,20.181 68.45,20.431 U2.5 68.45,22.45 67.25,23.65 C27.2 C26.2 C25.2 67.25,29.05 66.6,29.7 C28.2 ; U2.1 71.7,21.5 C23.2 C22.2 74.2,24.019 74.4,24.219 v1(74.4,24.3) ; R52.1 78.6,12.5 77.5,11.4 77.5,8.8 75.4,6.7 68.9,6.7 66.583,9.017 v1(66.583,10.217) 66.267,10.533 66.267,11.083 C24.2 ; R41.1 v1(83.6,26) 83.6,32.2 88.02,36.62 J6.1 J6.2
  L4 - Secondary w0.3: v1(66.583,10.217) 67,10.633 67,19.5 67.6,20.1 v1(68.7,20.1) 70.1,21.5 72.9,21.5 74.4,23 v1(74.4,24.3) 76.1,26 v1(83.6,26)
5V: R38.2 R39.2 R40.2
AFE_AOUT: R44.1
AFE_CS_n: J10.4 R50.1 | length 20.3
  L1 - Primary w0.203: v1(51.8,14.5) 53,13.3 R50.1
  L4 - Secondary w0.203: J10.4 51.8,7.66 v1(51.8,14.5)
AFE_OUT_3V3: R44.2 R45.1 R46.2 U2.10 | length 7.9
  L1 - Primary w0.203: R44.2 62.4,19.7 62.8,19.3 U2.10
  L1 - Primary w0.3: R44.2 R45.1
AFE_SAMPL: U2.9
BA1: 
BA2: 
BA3: 
BA4: 
BA5: 
BA6: 
BA7: 
BA8: 
BA9: 
BA10: 
BA11: 
BA12: 
BA13: 
BA14: 
BA15: 
BA16: 
BATT_CS: J9.3 U2.8 | length 54.5
  L1 - Primary w0.203: U2.8 66.075,21.525 66.075,20.025 v1(66.1,20)
  L4 - Secondary w0.203: v1(66.1,20) 69.1,23 71.4,23 73.7,25.3 73.7,28.3 87.9,42.5 91.1,42.5 96.5,47.9 96.5,54.358 J9.3
CB2: 
CB3: 
CB4: 
CB5: 
CB6: 
CB7: 
CB8: 
CB9: 
CB10: 
CB11: 
CB12: 
CB13: 
CB14: 
CB15: 
CB16: 
CELL_V0: J2.10 NT1.1
CELL_V1: J2.11 | length 14.8
  L1 - Primary w0.6: 22.25,54.6 22.25,54.85 24.9,57.5 30.2,57.5 31.325,58.625 31.475,58.625 31.5,58.65 31.5,58.8 31.5,58.95 31.525,58.975 31.675,58.975 31.85,59.15 34.8,59.15
CELL_V2: J2.12 | length 14.8
  L1 - Primary w0.6: 22.25,48.1 22.25,48.35 24.9,51 30.2,51 31.325,52.125 31.475,52.125 31.5,52.15 31.5,52.3 31.5,52.45 31.525,52.475 31.675,52.475 31.85,52.65 34.8,52.65
CELL_V3: J2.13 | length 14.8
  L1 - Primary w0.6: 22.25,41.6 22.25,41.85 24.9,44.5 30.2,44.5 31.325,45.625 31.475,45.625 31.5,45.65 31.5,45.8 31.5,45.95 31.525,45.975 31.675,45.975 31.85,46.15 34.8,46.15
CELL_V4: J2.14 | length 14.8
  L1 - Primary w0.6: 22.25,35.1 22.25,35.35 24.9,38 30.2,38 31.325,39.125 31.475,39.125 31.5,39.15 31.5,39.3 31.5,39.45 31.525,39.475 31.675,39.475 31.85,39.65 34.8,39.65
CELL_V5: J2.15 | length 14.8
  L1 - Primary w0.6: 22.25,28.6 22.25,28.85 24.9,31.5 30.2,31.5 31.325,32.625 31.475,32.625 31.5,32.65 31.5,32.8 31.5,32.95 31.525,32.975 31.675,32.975 31.85,33.15 34.8,33.15
CELL_V6: J2.16 | length 14.8
  L1 - Primary w0.6: 22.25,22.1 22.25,22.35 24.9,25 30.2,25 31.325,26.125 31.475,26.125 31.5,26.15 31.5,26.3 31.5,26.45 31.525,26.475 31.675,26.475 31.85,26.65 34.8,26.65
CELL_V7: J2.17 | length 14.8
  L1 - Primary w0.6: 22.25,15.6 22.25,15.85 24.9,18.5 30.2,18.5 31.325,19.625 31.475,19.625 31.5,19.65 31.5,19.8 31.5,19.95 31.525,19.975 31.675,19.975 31.85,20.15 34.8,20.15
CELL_V8: J2.18 | length 14.3
  L1 - Primary w0.6: 22.25,10.1 22.25,10.35 24.65,12.75 31.1,12.75 31.325,12.975 31.5,13.15 31.5,13.3 32.9,13.3 33.25,13.65 34.8,13.65
CELL_V9: J2.9 | length 23.2
  L1 - Primary w0.6: v2(31.5,6.5) 31.5,7.8
  L4 - Secondary w0.6: 22.25,22.1 22.25,11.5 27.25,6.5 v2(31.5,6.5)
CELL_V10: J2.8 | length 14.7
  L4 - Secondary w0.6: 22.25,28.6 22.25,28.35 25.35,25.25 30.65,25.25 31.325,24.575 31.475,24.575 31.5,24.55 31.5,24.4 34.35,24.4 34.7,24.05 34.8,24.05
CELL_V11: J2.7 | length 14.7
  L4 - Secondary w0.6: 22.25,35.1 22.25,34.85 25.35,31.75 30.65,31.75 31.325,31.075 31.475,31.075 31.5,31.05 31.5,30.9 34.35,30.9 34.7,30.55 34.8,30.55
CELL_V12: J2.6 | length 14.7
  L4 - Secondary w0.6: 22.25,41.6 22.25,41.35 25.35,38.25 30.65,38.25 31.325,37.575 31.475,37.575 31.5,37.55 31.5,37.4 34.35,37.4 34.7,37.05 34.8,37.05
CELL_V13: J2.5 | length 14.7
  L4 - Secondary w0.6: 22.25,48.1 22.25,47.85 25.35,44.75 30.65,44.75 31.325,44.075 31.475,44.075 31.5,44.05 31.5,43.9 34.35,43.9 34.7,43.55 34.8,43.55
CELL_V14: J2.4 | length 14.7
  L4 - Secondary w0.6: 22.25,54.6 22.25,54.35 25.35,51.25 30.65,51.25 31.325,50.575 31.475,50.575 31.5,50.55 31.5,50.4 34.35,50.4 34.7,50.05 34.8,50.05
CELL_V15: J2.3 | length 14.7
  L4 - Secondary w0.6: 22.25,61.1 22.25,60.85 25.35,57.75 30.65,57.75 31.325,57.075 31.475,57.075 31.5,57.05 31.5,56.9 34.35,56.9 34.7,56.55 34.8,56.55
CELL_V16: J2.2 | length 47.2
  L4 - Secondary w0.6: J2.2 6.449,47.869 5.131,47.869 4,49 4,51.75 5,52.75 7.5,52.75 7.505,52.745 12.245,52.745 15.75,56.25 15.75,62 19,65.25 30.75,65.25 31.5,64.5 31.5,63.4 34.35,63.4 34.7,63.05 34.8,63.05
CHG_EN: U2.18
CHG_G: 
CP_EN: U2.19
CT1: 
CT2: 
CT3: 
CT4: 
CT5: 
CT6: 
CT7: 
CT8: 
CT9: 
CT10: 
CT11: 
CT12: 
CT13: 
CT14: 
CT15: 
CT16: 
CV1: 
CV2: 
CV3: 
CV4: 
CV5: 
CV6: 
CV7: 
CV8: 
CV9: 
CV10: 
CV11: 
CV12: 
CV13: 
CV14: 
CV15: 
CV16: 
DIV: R51.2 U3.4 | length 2.7
  L1 - Primary w0.203: R51.2 59.36,25.1 U3.4
DSG_EN: U2.20
DSG_G: 
HFCK_IN: U2.6 U3.5 | length 8.2
  L1 - Primary w0.203: U3.5 63.51,25.29 65.3,23.5 66.5,23.5 67.65,22.35 U2.6
JTCK/SWCLK: J6.9 U2.24 | length 29.7
  L1 - Primary w0.203: U2.24 73.35,13.05 74.1,13.8 77.7,13.8 79.7,15.8 86.5,15.8 88.8,18.1 88.8,25.4 89.86,26.46 J6.9
JTDI: J6.5 U2.25 | length 32.6
  L1 - Primary w0.203: U2.25 77.3,14.5 79.3,16.5 86.063,16.5 87.9,18.337 87.9,30.6 88.84,31.54 J6.5
JTDO: J6.13 U2.26 | length 22.7
  L1 - Primary w0.203: U2.26 76.969,15.3 78.969,17.3 85.731,17.3 87.1,18.669 v1(87.1,21.5)
  L4 - Secondary w0.203: v1(87.1,21.5) 87.16,21.44 91.416,21.44 J6.13
JTMS/SWDIO: J6.7 U2.23 | length 34.5
  L1 - Primary w0.203: U2.23 70.85,11.95 71.1,11.7 73.1,11.7 74.5,13.1 78.1,13.1 80.1,15.1 86.9,15.1 89.8,18 v1(89.8,25.2)
  L4 - Secondary w0.203: v1(89.8,25.2) 89.8,27.324 J6.7
JTRST: J6.3 U2.27 | length 33
  L1 - Primary w0.203: U2.27 76.637,16.1 78.637,18.1 85.4,18.1 86.3,19 86.3,31.3 89.08,34.08 J6.3
LDO_EN: 
LDO_SW_G: 
NetC30_2: C30.2 U2.2 Y1.1 | length 4
  L1 - Primary w0.203: U2.2 70.85,22.702 71.213,23.064 Y1.1 C30.2
NetC31_2: C31.2 U2.3 Y1.2 | length 4
  L1 - Primary w0.203: C31.2 Y1.2 70.387,22.872 70.05,22.535 U2.3
NetC32_2: 
NetC33_2: 
NetFB1_2: Q20.4 | length 1.4
  L1 - Primary w0.203: v1@48.3,92.1 v1(48.302,92.098) 49.727,92.098 Q20.4
NetFB2_2: Q21.4 | length 1.4
  L1 - Primary w0.203: v1@48.3,85.1 48.303,85.097 49.728,85.097 Q21.4
  other v1: 48.301,85.099
NetFB3_2: Q19.4 | length 1.4
  L1 - Primary w0.203: Q19.4 67.272,95.908 68.697,95.908 v1(68.7,95.91)
NetFB4_2: Q18.4 | length 1.4
  L1 - Primary w0.203: Q18.4 67.272,88.907 68.697,88.907 v1(68.7,88.91)
NetJ3_1: J3.1 R38.1 | length 3.2
  L1 - Primary w0.3: J3.1 R38.1@11.2,64.75
NetJ4_1: J4.1 R39.1 | length 3.2
  L1 - Primary w0.3: J4.1 R39.1
NetJ5_1: J5.1 R40.1 | length 3.2
  L1 - Primary w0.3: J5.1 R40.1
NetJ12_1: 
NetLED1_1: LED1.1 R52.2 | length 1.5
  L1 - Primary w0.3: LED1.1 R52.2
NetLED1_2: LED1.2 Q17.3 | length 2.1
  L1 - Primary w0.3: LED1.2 80.45,8.1 Q17.3
NetQ1_2:  | length 3.8
  L4 - Secondary w0.6: 26.75,61.1 30.55,61.1
NetQ2_2:  | length 3.8
  L4 - Secondary w0.6: 26.75,54.6 30.55,54.6
NetQ3_2:  | length 3.8
  L4 - Secondary w0.6: 26.75,48.1 30.55,48.1
NetQ4_2:  | length 3.8
  L4 - Secondary w0.6: 26.75,41.6 30.55,41.6
NetQ5_2:  | length 3.8
  L4 - Secondary w0.6: 26.75,35.1 30.55,35.1
NetQ6_2:  | length 3.8
  L4 - Secondary w0.6: 26.75,28.6 30.55,28.6
NetQ7_2:  | length 3.8
  L4 - Secondary w0.6: 26.75,22.1 30.55,22.1
NetQ8_2:  | length 3.8
  L1 - Primary w0.6: 26.75,10.1 30.55,10.1
NetQ9_2:  | length 3.8
  L1 - Primary w0.6: 26.75,15.6 30.55,15.6
NetQ10_2:  | length 3.8
  L1 - Primary w0.6: 26.75,22.1 30.55,22.1
NetQ11_2:  | length 3.8
  L1 - Primary w0.6: 26.75,28.6 30.55,28.6
NetQ12_2:  | length 3.8
  L1 - Primary w0.6: 26.75,35.1 30.55,35.1
NetQ13_2:  | length 3.8
  L1 - Primary w0.6: 26.75,41.6 30.55,41.6
NetQ14_2:  | length 3.8
  L1 - Primary w0.6: 26.75,48.1 30.55,48.1
NetQ15_2:  | length 3.8
  L1 - Primary w0.6: 26.75,54.6 30.55,54.6
NetQ16_2:  | length 3.8
  L1 - Primary w0.6: 26.75,61.1 30.55,61.1
NetQ23_1: 
NetQ23_3: 
NetR33_2: 
NetR34_1: 
NetR35_1: 
NetR36_1: 
NetR37_1: 
NetR42_2: R42.2 U2.31 | length 11.9
  L1 - Primary w0.203: U2.31 75.7,19.3 77.1,20.7 77.1,24.4 76.5,25 75.1,25 74.2,25.9 R42.2
NetR47_2: R47.2 U2.11 | length 4.7
  L1 - Primary w0.203: R47.2 61.5,18.1 61.9,18.5 U2.11
NetR48_2: R48.2 U2.12 | length 5
  L1 - Primary w0.203: R48.2 61.3,16.5 62.5,17.7 U2.12
NetR49_2: R49.2 U2.13 | length 5.3
  L1 - Primary w0.203: R49.2 61.1,14.9 63.1,16.9 U2.13
NetR50_2: R50.2 U2.14 | length 5.7
  L1 - Primary w0.203: R50.2 60.136,13.336 60.836,13.336 63.6,16.1 U2.14
NetR57_1:  | length 0
  L1 - Primary w0.3: 60.3,72.2 60.312,72.188
NetR58_1:  | length 0
  L1 - Primary w0.3: 60.2,74.8 60.212,74.788
NetR59_1:  | length 0
  L1 - Primary w0.3: 60.3,73.5 60.312,73.488
NetR62_2: 
NetR65_1: 
NetR66_1: 
NRST: J6.15 R41.2 S1.1 S1.2 U2.4 | length 38.5
  L1 - Primary w0.203: U2.4 69.25,20.65 69.7,20.2 v1(71,20.2) ; v1(80.45,19.45) 80.557,19.45 80.807,19.7 S1.1 R41.2 ; S1.2 82,12.602 v1(83.3,13.902)
  L4 - Secondary w0.203: v1(71,20.2) 79.7,20.2 v1(80.45,19.45) ; v1(83.3,13.902) 79.9,17.302 79.9,18.9 v1(80.45,19.45) ; J6.15 91.336,18.7 81.2,18.7 v1(80.45,19.45)
PACK: 
PACKDIV: J9.6 U2.15 | length 56.2
  L1 - Primary w0.203: U2.15 v1(66,15.3)
  L4 - Secondary w0.203: v1(66,15.3) 65.3,15.3 65,15.6 65,21.8 67.7,24.5 71.1,24.5 72.3,25.7 72.3,28.9 89.6,46.2 89.6,54.342 J9.6
PCHG_EN: U2.22
PCHG_G: Q22.1 | length 2.3
  L1 - Primary w0.203: Q22.1 45.314,100.7 47.6,100.7
PMON_EN: U2.21
SET: R43.2 U3.3 | length 2.7
  L1 - Primary w0.203: R43.2 59.36,28.1 U3.3
SPI_MISO: J10.2 R48.1 | length 26.1
  L1 - Primary w0.203: v1(54,17.7) 55.1,16.6 58.4,16.6 R48.1
  L4 - Secondary w0.203: J10.2 49.1,10.04 49.1,15.7 51.1,17.7 v1(54,17.7)
SPI_MOSI: J10.1 R49.1 | length 34.1
  L1 - Primary w0.203: v1(52.9,16) 54,14.9 R49.1
  L4 - Secondary w0.203: J10.1 42.02,0.9 50.9,0.9 52.9,2.9 v1(52.9,16)
SPI_SCLK: J10.3 R47.1 | length 25.4
  L1 - Primary w0.203: v1(55,19.1) 56,18.1 R47.1
  L4 - Secondary w0.203: J10.3 50.4,8.8 50.4,15.1 52.2,16.9 54.581,16.9 55,17.319 v1(55,19.1)
STM32_HEARTBEAT: Q17.1 U2.7 | length 29.4
  L1 - Primary w0.203: U2.7 66.85,20.35 v1(68,19.2)
  L1 - Primary w0.3: Q17.1 83.675,7.175 86.175,7.175 v1(86.2,7.2)
  L4 - Secondary w0.203: v1(68,19.2) 70.3,19.2 70.5,19.4 75.1,19.4 86.2,8.3 v1(86.2,7.2)
USART_RX: J8.4 J9.4 U2.30 | length 55.1
  L1 - Primary w0.203: v1(71.5,18.5) U2.30 76.3,18.5 78.151,20.351 78.151,35.951 87.4,45.2
  L4 - Secondary w0.203: J8.4 70.3,10.9 70.3,17.3 v1(71.5,18.5)
USART_TX: J8.5 J9.1 U2.29 | length 53.6
  L1 - Primary w0.203: v1(71.5,17.2) 71.507,17.2 72.007,17.7 U2.29 76.7,17.7 79,20 79,35.6 88,44.6
  L4 - Secondary w0.203: J8.5 71.5,9.56 v1(71.5,17.2)
VBAT+: F1.2 Q20.1 Q20.2 Q20.3 Q21.1 Q21.2 Q21.3 R60.1 TP2.1
VBAT+_F: F1.1 J1.1
VBAT-: C22.1 C23.1 C24.1 C25.1 C26.1 C27.1 C28.1 C30.1 C31.1 J1.2 J3.2 J4.2 J5.2 J6.4 J6.6 J6.8 J6.10 J6.12 J6.14 J6.16 J6.18 J6.20 J7.2 J8.1 J9.2 J9.5 J10.5 NT1.2 Q17.2 R42.1 R46.1 R51.1 S1.3 S1.4 TP1.1 U2.16 U2.32 U3.2 | length 30.4
  L1 - Primary w0.3: v1(55.7,27.3) 55.781,27.3 56.081,27 56.6,27 R51.1 ; v1(57.1,20.7) 57.7,21.3 R46.1 ; v1(59.5,30.696) 59.557,30.639 59.557,30.543 60.3,29.8 C28.1 60.4,29.6 60.4,28.01 U3.2 ; v1(63.8,10) 63.8,10.55 64.45,11.2 64.45,14.375 64.575,14.5 U2.16 ; v1(64.6,25.7) 64.681,25.7 64.981,25.4 65.35,25.4 65.65,25.1 C27.1 ; v1(64.6,27.3) 64.681,27.3 64.981,27 65.35,27 65.65,26.7 C26.1 ; v1(64.6,28.9) 64.681,28.9 64.981,28.6 65.35,28.6 65.65,28.3 C25.1 ; C31.1 69.281,25.881 70,25.881 70.219,26.1 v1(70.3,26.1) ; v1(71.3,26.1) 71.381,26.1 71.6,25.881 72.319,25.881 C30.1 ; U2.32 75.4,20.1 75.8,20.5 C23.1 C22.1 v1(75.8,24.2) ; R42.1 75.8,26.1 v1(76.8,27.1) ; v1(82.4,9.1) 82.425,9.075 83.625,9.075 Q17.2 ; v1(83.6,12.5) S1.4 ; v1(83.7,19.7) S1.3
  other v1: 53.9,16 66,16.4 54.1,18.7 66.1,18.9 55,20.1 87.1,22.5 88.9,26.6
VBAT_CS: Q18.1 Q18.2 Q18.3 Q19.1 Q19.2 Q19.3 R64.1
VCHG_DSG: Q18.5 Q18.6 Q18.7 Q18.8 Q19.5 Q19.6 Q19.7 Q19.8 Q20.5 Q20.6 Q20.7 Q20.8 Q21.5 Q21.6 Q21.7 Q21.8 Q22.3
VLDO: 
VPACK+: J7.1 R64.2
VPCHG: Q22.2 R60.2
pads on no net: J2.1 J2.MH1 J2.MH2 J6.11 J6.17 J6.19 J8.2 J8.3 J8.6 J9.MH1 J9.MH2 MH1.0 MH2.0 MH3.0 MH4.0 U2.28
copper on no net:
  other v1: 4.5,2 95.5,2 2.732,2.732 6.268,2.732 93.732,2.732 97.268,2.732 2,4.5 7,4.5 93,4.5 98,4.5 2.732,6.268 6.268,6.268 93.732,6.268 97.268,6.268 4.5,7 95.5,7 4.5,103 95.5,103 2.732,103.732 6.268,103.732 93.732,103.732 97.268,103.732 2,105.5 7,105.5 93,105.5 98,105.5 2.732,107.268 6.268,107.268 93.732,107.268 97.268,107.268 4.5,108 95.5,108

## Polygon pours and split planes (outlines as drawn)
VBAT_CS on L1 - Primary "VBAT_CS_L01_P007" (solid, pour order 7): 66.25,97.75 66.25,84.25 74.5,84.25 74.5,97.75
VBAT+ on L1 - Primary "VBAT+_L01_P005" (solid, pour order 5): 44.25,77.5 44.75,78 44.75,85.75 50.75,85.75 50.75,97.75 33.5,97.75 33.5,100.5 28.25,100.5 28.25,85.75 42.75,85.75 42.75,78 43.25,77.5
VBAT+_F on L1 - Primary "VBAT+_F_L01_P004" (solid, pour order 4): 1,86.25 1,102 23.5,102 23.5,86.25
VCHG_DSG on L1 - Primary "VCHG_DSG_L01_P006" (solid, pour order 6): 51.25,103.5 43.5,103.5 43.5,107.5 65.75,107.5 65.75,84.25 51.25,84.25
VPACK+ on L1 - Primary "VPACK+_L01_P008" (solid, pour order 8): 78.5,101.75 98.75,101.75 98.75,86.25 78.5,86.25
CELL_V0 on L1 - Primary "CELL_V0_L01_P021" (solid, pour order 21): 8,49.25 10,49.25 19.25,58.5 24.5,58.5 24.5,63.5 20,63.5 12.25,55.75 9.5,55.75 8,54.25 8,50.75
CELL_V1 on L1 - Primary "CELL_V1_L01_P020" (solid, pour order 20): 8,46.25 11.25,46.25 17,52 24.5,52 24.5,57 19.5,57 16.5,54 15.25,54 10,48.75 8,48.75
CELL_V2 on L1 - Primary "CELL_V2_L01_P019" (solid, pour order 19): 8,43.25 8,45.5 11.25,45.5 16.25,50.5 24.5,50.5 24.5,45.5 17,45.5 14.75,43.25 11.25,43.25
CELL_V3 on L1 - Primary "CELL_V3_L01_P018" (solid, pour order 18): 24.5,39 15.75,39 14.5,40.25 8,40.25 8,42.5 15,42.5 16.5,44 24.5,44
CELL_V4 on L1 - Primary "CELL_V4_L01_P017" (solid, pour order 17): 24.5,32.5 17.75,32.5 13,37.25 8,37.25 8,39.5 14.5,39.5 16.5,37.5 24.5,37.5
CELL_V5 on L1 - Primary "CELL_V5_L01_P016" (solid, pour order 16): 24.5,26 19.75,26 18,27.75 18,28.75 12.5,34.25 8,34.25 8,36.5 13,36.5 18.5,31 24.5,31
CELL_V6 on L1 - Primary "CELL_V6_L01_P015" (solid, pour order 15): 24.5,19.5 17,19.5 15.25,21.25 15.25,27.25 11.25,31.25 8,31.25 8,33.5 12.5,33.5 17.5,28.5 17.5,25.25 18.25,24.5 24.5,24.5
CELL_V7 on L1 - Primary "CELL_V7_L01_P014" (solid, pour order 14): 11,28.25 8,28.25 8,30.25 11.5,30.25 14.75,27 14.75,21 17.75,18 24.5,18 24.5,13 18.5,13 12.75,18.75 12.75,26.5
CELL_V8 on L1 - Primary "CELL_V8_L01_P013" (solid, pour order 13): 8,27.5 11,27.5 12.25,26.25 12.25,18 17.75,12.5 24.5,12.5 24.5,7.5 17.25,7.5 8,16.75 8,22.25
VPCHG on L1 - Primary "VPCHG_L01_P009" (solid, pour order 9): 34,98.75 34,101.25 28.25,101.25 28.25,107.5 42.25,107.5 42.25,98.75
CELL_V15 on L4 - Secondary "CELL_V15_L04_P028" (solid, pour order 28): 4.5,43 11.5,43 16.75,48.25 16.75,52.5 19,54.75 19,57.75 19.75,58.5 24.25,58.5 24.25,63.75 20.25,63.75 16.75,60.25 16.75,56 14.75,54 14.75,49.5 12,46.75 4.5,46.75
CELL_V14 on L4 - Secondary "CELL_V14_L04_P027" (solid, pour order 27): 4.5,40 12,40 19,47 19,51.25 19.75,52 24.5,52 24.5,57.25 19.5,57.25 19.5,54.5 17.25,52.25 17.25,47.75 11,41.5 8.75,41.5 8.75,42.5 4.5,42.5
CELL_V13 on L4 - Secondary "CELL_V13_L04_P026" (solid, pour order 26): 4.5,37 12.25,37 20.75,45.5 24.5,45.5 24.5,50.75 19.5,50.75 19.5,46.75 11.25,38.5 8.75,38.5 8.75,39.5 4.5,39.5
CELL_V12 on L4 - Secondary "CELL_V12_L04_P025" (solid, pour order 25): 4.5,36.5 4.5,34 13,34 18,39 24.5,39 24.5,44.25 20.25,44.25 11.5,35.5 8.75,35.5 8.75,36.5
CELL_V11 on L4 - Secondary "CELL_V11_L04_P024" (solid, pour order 24): 4.5,33.5 4.5,31 13.5,31 15,32.5 24.5,32.5 24.5,37.75 17.75,37.75 16.75,36.75 12.5,32.5 8.5,32.5 8.5,33.5
CELL_V10 on L4 - Secondary "CELL_V10_L04_P023" (solid, pour order 23): 4.5,30.5 4.5,28 10.5,28 12.5,26 24.5,26 24.5,31.25 15.25,31.25 13.5,29.5 8.5,29.5 8.5,30.5
CELL_V9 on L4 - Secondary "CELL_V9_L04_P022" (solid, pour order 22): 8.25,27.5 4.5,27.5 4.5,21.75 6.75,19.5 24.5,19.5 24.5,24.75 9,24.75 8.25,25.5
VBAT- on L2 - GND "VBAT-_L02_P002" (solid, pour order 2): 0,2.5 0,107.5 cw(c2.5,107.5) 2.5,110 97.5,110 cw(c97.5,107.5) 100,107.5 100,2.5 cw(c97.5,2.5) 97.5,0 2.5,0 cw(c2.5,2.5)
VBAT- on L3 - GND "VBAT-_L03_P003" (solid, pour order 3): 0,2.5 0,107.5 cw(c2.5,107.5) 2.5,110 97.5,110 cw(c97.5,107.5) 100,107.5 100,2.5 cw(c97.5,2.5) 97.5,0 2.5,0 cw(c2.5,2.5)

## Silkscreen, mask and mechanical layers (free items; w line width, h text height)
Mechanical 1:
  the board outline again, w0.254